# Altium PCB PCB1.PcbDoc
Units mil, origin at the board's own origin, x right, y up, seen from the top; angles counter-clockwise.
Board outline 2990 x 760 mil, 2 copper layers (Top Layer, Bottom Layer); 17 components, 10 nets, 34 pads, 0 vias.
Unrouted connection lines stored in the file: 16.
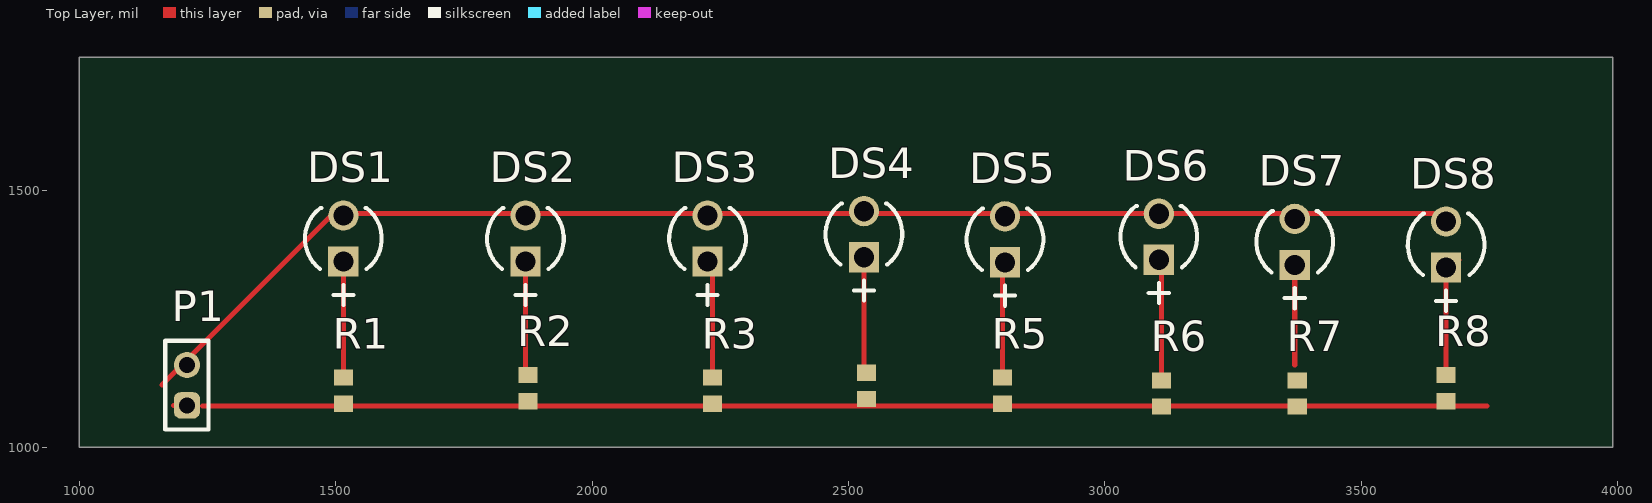
[diagram p0: Top Layer view]
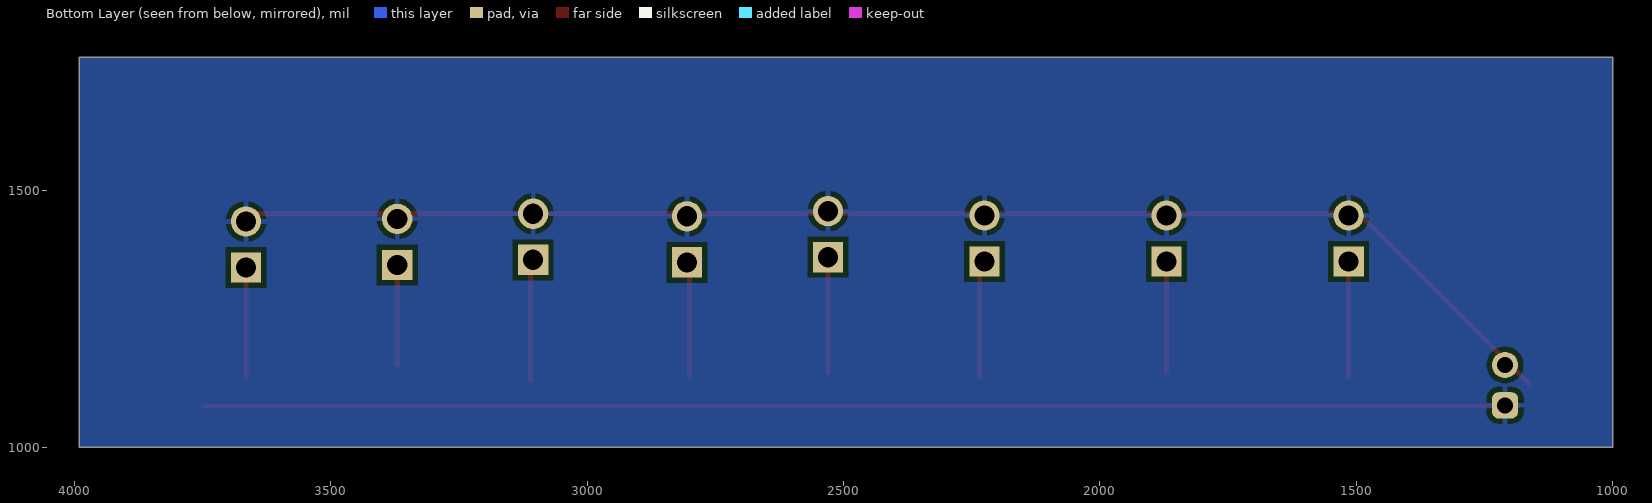
[diagram p1: Bottom Layer view, seen from below]

## Layer stack, top to bottom
Top Solder: solder mask 0.4, Solder Resist, Dk 3.5
Top Layer: signal copper 1.4
Dielectric 1: dielectric 12.6, FR-4, Dk 4.8
Bottom Layer: signal copper 1.4
Bottom Solder: solder mask 0.4, Solder Resist, Dk 3.5

## Board outline
1000,1000 3990,1000 3990,1760 1000,1760

## Design rules (kind name [scope] priority, off if disabled: settings)
Clearance [All] p1: gap=10 ignorepadtopadclearanceinfootprint=FALSE except(0: Arc-Hole Track-Hole SMDPad-Hole THPad-Hole Via-Hole Fill-Hole Poly-Hole Region-Hole Text-Hole)
PolygonConnect [All] p1: connectstyle=Relief reliefconductorwidth=10 reliefentries=4 polygonreliefangle="90 Angle" airgapwidth=10
RoutingVias [All] p1: holewidth=28 width=50 viastyle="Through Hole" minholewidth=28 minwidth=50 maxholewidth=28 maxwidth=50
SolderMaskExpansion [All] p1: expansion=4 istentingtop=FALSE
Width [All] p1: maxlimit=10 minlimit=10 preferedwidth=10
30 further rules are at their usual default settings.

## Classes and differential pairs
component class Sheet1: DS1 DS2 DS3 DS4 DS5 DS6 DS7 DS8 R1 R2 R3 R5 R6 R7 R8

## Components (designator, comment, footprint, x,y, rotation, side; value= is the part's Value field where it differs from the comment)
DS1 "304090041.0" LED-2P-2.28-3MM_A 1515,1406.46 r90 top
DS2 "304090041.0" LED-2P-2.28-3MM_A 1870,1406.46 r90 top
DS3 "304090041.0" LED-2P-2.28-3MM_A 2225,1406.46 r90 top
DS4 "304090041.0" LED-2P-2.28-3MM_A 2530,1415 r90 top
DS5 "304090041.0" LED-2P-2.28-3MM_A 2805,1405 r90 top
DS6 "304090041.0" LED-2P-2.28-3MM_A 3105,1410 r90 top
DS7 "304090041.0" LED-2P-2.28-3MM_A 3370,1400 r90 top
DS8 "304090041.0" LED-2P-2.28-3MM_A 3665,1395 r90 top
P1 "62000211121" 62000211121 1210,1120.63 r90 top (schematic designator P?)
R1 "CRCW06030000Z0EA" RESC1609X50X30NL8T20 1515,1110 r90 top
R2 "CRCW06030000Z0EA" RESC1609X50X30NL8T20 1875,1115 r270 top
R3 "CRCW06030000Z0EA" RESC1609X50X30NL8T20 2235,1110 r90 top
R5 "CRCW06030000Z0EA" RESC1609X50X30NL8T20 2800,1110 r90 top
R6 "CRCW06030000Z0EA" RESC1609X50X30NL8T20 3110,1104.41 r90 top
R7 "CRCW06030000Z0EA" RESC1609X50X30NL8T20 3375,1104.41 r90 top
R8 "CRCW06030000Z0EA" RESC1609X50X30NL8T20 3665,1115 r90 top
? "CRCW06030000Z0EA" RESC1609X50X30NL8T20 2535,1119.41 r270 top

## Footprints (in the part's own frame and the unit in brackets; to place one, negate y for a bottom-side part, rotate by r counter-clockwise, add the part's x,y. Pads: shape width x height; smd on the part's side, far side on the other; paste and mask are expansions set on the pad)
62000211121 [mm] "Pin Header, pitch 2.00 mm, THT, Vertical, single row, 2p"
  rrect50% 1.3x1.3 hole 0.8: 1(-1,0)
  round 1.3 hole 0.8: 2(1,0)
  silkscreen extent -2.2,-1.07 2.2,1.07, body extent -2,-1 2,1, height 6.05
LED-2P-2.28-3MM_A [mm] "LED, 2-Leads, Dia 3mm, Pitch 2.28mm"
  rect 1.5x1.5 hole 1: 1(-1.14,0)
  round 1.5 hole 1: 2(1.14,0)
  silkscreen extent -3.29,-1.9 1.52,1.9, body extent -1.9,-1.91 1.52,1.91, height 5.3
RESC1609X50X30NL8T20 [mm] "Chip Resistor, 2-Leads, Body 1.65x0.95mm, IPC Medium Density"
  rect 0.8x0.95 smd: 1(-0.65,0) 2(0.65,0)
  body extent -0.82,-0.48 0.82,0.48, height 0.5

## Part data
DS1 DS2 DS3 DS4 DS5 DS6 DS7 DS8: library part CMP-2100-03574-1, "Red LED, 1.9 to 2.4 V, -25 to 85 degC, 2-Pin THD", Manufacturer="Shenzhen CGX", Package Description="2-Pin Through Hole Device, Dia 3 mm, Pitch 2.28 mm", Datasheet URL=http://datasheet.octopart.com/304090041-Chengguangxing-datasheet-62330656.pdf, Datasheet Version=41883.0, Manufacturer URL=http://szcgx.com/, Package Reference=304090041.0
P1: library part CMP-1502-00956-3, Contact Resistance=20mΩ, Current Rating=2A, Max Operating Temperature=105°C, Min Operating Temperature=-40°C, Operating Supply Voltage=200V, Contact Material=Gold, Gender=Male, Height=6.35mm, Lead Pitch=2mm, NexarPartId=61924778, Number of Contacts=2, Number of Pins=2, Number of Rows=1, Orientation=Vertical, RoHS=Non-Compliant, Voltage Rating=200V
R1 R2 R3 R5 R6 R7 R8 ?: library part CMP-2000-03816-5, "Chip Resistor, 0 Ohm, Jumper, 100 mW, -55 to 155 degC, 0603 (1608 Metric), RoHS, Tape and Reel", Manufacturer="Vishay Semiconductor", Max Operating Temperature="155 degC", Min Operating Temperature="-55 degC", Package Quantity=5000, Voltage Rating="75 V", ComponentLink1Description="Manufacturer URL", ComponentLink1URL=http://www.vishay.com/, ComponentLink2Description=Datasheet, ComponentLink2URL=http://www.vishay.com/docs/20035/dcrcwe3.pdf, DatasheetVersion=06/2012, Height="0.45 mm", Length="1.55 mm", Mount="Surface Mount", Mounting Technology="Surface Mount", PackageDescription="2-Pin Surface Mount Device, Body 1.575 x 0.85 mm", PackageReference=0603, Packaging="Tape and Reel", Pins=2, REACH SVHC=Unknown, RoHSCompliant=true

## Nets (pads, with @x,y where several pads share a name; then routed paths per layer and width w, separated by ;. In a path a pad name is that pad's centre, name@x,y a point inside that pad or via, vN(x,y) a via of type N, cw(c..) or ccw(c..) an arc to the next point about the centre after c; other vN are vias at no path point)
GND: DS1.2 DS2.2 DS3.2 DS4.2 DS5.2 DS6.2 DS7.2 DS8.2 P1.1
Net_1: ?.1 DS4.1
Net_2: ?.2 P1.2 R1.2 R2.2 R3.2 R5.2 R6.2 R7.2 R8.2
NetDS1_1: DS1.1 R1.1
NetDS2_1: DS2.1 R2.1
NetDS3_1: DS3.1 R3.1
NetDS5_1: DS5.1 R5.1
NetDS6_1: DS6.1 R6.1
NetDS7_1: DS7.1 R7.1
NetDS8_1: DS8.1 R8.1
copper on no net: | length 6935
  Top Layer w10: 1161.26,1121.26 1490,1450 ; 1183.74,1081.26 1210,1081.26 ; 1240,1080 3745,1080 ; 1510,1455 3640,1455 ; 1515,1135.59 1515,1375 ; 1870,1145.59 1870,1361.57 ; 2235,1135.59 2235,1367.91 ; 2530,1145 2530,1370.12 ; 2800,1135.59 2800,1365 ; 3110,1130 3110,1376.46 ; 3370,1160 3370,1355.12 ; 3665,1135 3665,1340 ; 3670,1365 3690,1365

## Polygon pours and split planes (outlines as drawn)
GND on Bottom Layer "GND_L02_P000" (solid, pour order 0): 1000,1760 1000,1000 3990,1000 3990,1760